# EAGLE board PowerModule_v001 (EAGLE 9.6.2)

Size 160 x 100 mm. Coordinates in mm from the lower left corner, seen from the top.
Outline: 0,0 160,0 160,100 0,100 0,0
Copper layers (1*16): Top 0.035mm / dielectric 1.5mm / Bottom 0.035mm
Design rules "default": minimum track width 6mil, minimum drill 0.35mm, track to track 6mil, track to pad 6mil, pad to pad 6mil, via to via 6mil, smd to smd 6mil, copper to edge 40mil, drill to drill 6mil, minimum pad ring 10mil, minimum via ring 8mil, stop-mask expansion 4mil, vias tented up to drill 0mil, thermal gap 10mil
Net classes: 0 default: width 0.152 mm, clearance 0.152 mm

## Footprints (pad centres in the part's own frame; a part is rotated, then mirrored left to right if it is on the bottom)
0603 = smd 1.1 x 1: 1 -0.85,0; 2 0.85,0
NIC_10X10.5_CAP = smd 4 x 2.5: + 4,0; - -4,0
1X2-3.5MM = drill 1 pad 2.184: 1 1.8,0; 2 -1.7,0
JST-2-SMD = smd 1 x 4.6: 1 -1,-3.7; 2 1,-3.7 | smd 1.6 x 3.4: NC1 -3.4,1.5; NC2 3.4,1.5
JUMPER2 = drill 1 pad 1.93 octagon: 1 2.54,0; 2 0,0
SMT-JUMPER_2_NC_TRACE_NO-SILK = smd 0.635 x 1.27: 1 -0.508,0; 2 0.508,0
CHIP-LED0603 = smd 0.8 x 0.8: A 0,-0.75; C 0,0.75
R0603_P = smd 0.7 x 0.85: 1 -0.65,0; 2 0.65,0
SWITCH-2.5X3.2-6 = drill 1 pad 1.8: 1 0,0; 2 0,2.5; 3 0,5; 4 3.2,0; 5 3.2,2.5; 6 3.2,5
MA12-1 = drill 1.016 long: 1 -13.97,0; 2 -11.43,0; 3 -8.89,0; 4 -6.35,0; 5 -3.81,0; 6 -1.27,0; 7 1.27,0; 8 3.81,0; 9 6.35,0; 10 8.89,0; 11 11.43,0; 12 13.97,0
S2751-46R = smd 2.2 x 1.4: 1 0,0
PARTICLE_POWER_MODULE_SMT = smd 2.032 x 2.794: 1 5.08,1.016; 2 7.62,1.016; 3 10.16,1.016; 4 12.7,1.016; 5 15.24,1.016; 6 17.78,1.016; 7 20.32,1.016; 8 22.86,1.016; 9 25.4,1.016; 10 27.94,1.016; 11 30.48,1.016; 12 33.02,1.016; 13 33.02,21.869; 14 30.48,21.869; 15 27.94,21.869; 16 25.4,21.869; 17 22.86,21.869; 18 20.32,21.869; 19 17.78,21.869; 20 15.24,21.869; 21 12.7,21.869; 22 10.16,21.869; 23 7.62,21.869; 24 5.08,21.869; 25 2.54,21.869 | smd 3.5 x 2.2: 26 13.239,12.153 | smd 2.8 x 2.8: 27 26.803,10.82 | smd 1.2 x 1.4: 28 30.969,11.698; 29 32.969,11.698

## Placement (x,y rotation side)
C1  0.1uF  [0603]  86.36,10.16 90 top
C2  100pF  [0603]  90.17,10.16 90 top
C3  47uF  [NIC_10X10.5_CAP]  99.06,15.24 90 top
C4  0.1uF  [0603]  107.95,10.16 90 top
C5  47uF  [NIC_10X10.5_CAP]  77.47,15.24 90 top
C6  100pF  [0603]  107.95,13.97 90 top
C7  47uF  [NIC_10X10.5_CAP]  116.84,15.24 90 top
C8  0.1uF  [0603]  125.73,10.16 90 top
C9  100pF  [0603]  125.73,13.97 90 top
C10  0.1uF  [0603]  -26.67,-234.95 0 top  (outside the outline)
J1  1X2-3.5MM  [1X2-3.5MM]  50.8,12.7 90 top
J2  1X2-3.5MM  [1X2-3.5MM]  60.96,12.7 90 top
J4  [JST-2-SMD]  -24.13,-182.88 0 top  (outside the outline)
J9  1X2-3.5MM  [1X2-3.5MM]  40.64,12.7 90 top
JP1  [JUMPER2]  -26.67,-132.08 0 top  (outside the outline)
JP2  [JUMPER2]  -26.67,-137.16 0 top  (outside the outline)
JP7  JUMPER-SMT_2_NC_TRACE_NO-SILK  [SMT-JUMPER_2_NC_TRACE_NO-SILK]  -20.32,-173.99 0 top  (outside the outline)
JP9  [JUMPER2]  -26.67,-127 0 top  (outside the outline)
LED3  [CHIP-LED0603]  -25.4,-170.18 0 top  (outside the outline)
R13  2K  [R0603_P]  -26.67,-177.8 0 top  (outside the outline)
R19  10K  [R0603_P]  -26.67,-163.83 0 top  (outside the outline)
S4  [SWITCH-2.5X3.2-6]  -26.67,-160.02 0 top  (outside the outline)
SV1  [MA12-1]  -12.7,-228.6 0 top  (outside the outline)
TP1  [S2751-46R]  130.81,10.16 90 top
TP2  [S2751-46R]  -26.67,-101.6 0 top  (outside the outline)
TP3  [S2751-46R]  -26.67,-106.68 0 top  (outside the outline)
TP4  [S2751-46R]  -26.67,-111.76 0 top  (outside the outline)
TP5  [S2751-46R]  -26.67,-116.84 0 top  (outside the outline)
TP6  [S2751-46R]  -26.67,-121.92 0 top  (outside the outline)
U$2  PARTICLE_POWER_MODULE_SMT  [PARTICLE_POWER_MODULE_SMT]  43.18,-80.01 0 top  (outside the outline)

## Library data of the parts
C1 C2 C4 C6 C8-C10 = SparkFun-Capacitors; PROD_ID: CAP-08604
C3 C5 C7 = particle-studios; PROD_ID: CAP-08362
J1 J2 J9 LED3 = adafruit
J4 = SparkFun-Connectors; PROD_ID: CONN-11443
JP1 JP2 JP9 = microbuilder
JP7 = SparkFun-Jumpers
R13 = particle-studios; DESP: RES SMD 2K2 OHM 1% 1/10W 0603
R19 = particle-studios; DESP: RES SMD 100K OHM 1% 1/10W 0603
S4 = SparkFun-Retired
SV1 = con-lstb; OC_FARNELL: unknown; OC_NEWARK: unknown
TP1-TP6 U$2 = particle-studios

## Nets
+3V3: C1.1 C2.1 C5.+ J9.1 JP7.1 JP9.1 R19.2 SV1.11 TP1.1 U$2.1 U$2.2
GND: C1.2 C2.2 C3.- C4.2 C5.- C6.2 C7.- C8.2 C9.2 J1.2 J2.2 J9.2 JP1.2 JP2.2 JP9.2 SV1.12 TP2.1 TP4.1 TP6.1 U$2.9 U$2.10 U$2.26 U$2.27
N$1: JP7.2 R13.1
N$2: C3.+ C4.1 C6.1 J1.1 JP1.1 TP3.1 U$2.5 U$2.6
N$3: C7.+ C8.1 C9.1 J2.1 JP2.1 TP5.1 U$2.11 U$2.12
N$4: SV1.2 U$2.24
N$5: SV1.4 U$2.17
N$6: SV1.5 U$2.16
N$7: SV1.6 U$2.15
N$8: SV1.7 U$2.14
N$9: R19.1 S4.2 S4.5
N$10: C10.1 J4.1 U$2.21 U$2.22
N$11: LED3.C SV1.8 U$2.13
N$12: LED3.A R13.2
N$13: S4.3 S4.6 SV1.1 U$2.25
N$14: C10.2 J4.2 U$2.18 U$2.19 U$2.20
N$15: SV1.9 U$2.29
N$16: SV1.10 U$2.28
PMIC_REG: SV1.3
PMIC_RGEN: U$2.7

## Tracks (layer width: path | path; a pad name or v marks a point on that pad's centre or on a via)
+3V3  (10 unrouted)
GND  (22 unrouted)
N$1  (1 unrouted)
N$2  (7 unrouted)
N$3  (7 unrouted)
N$4  (1 unrouted)
N$5  (1 unrouted)
N$6  (1 unrouted)
N$7  (1 unrouted)
N$8  (1 unrouted)
N$9  (2 unrouted)
N$10  (3 unrouted)
N$11  (2 unrouted)
N$12  (1 unrouted)
N$13  (3 unrouted)
N$14  (4 unrouted)
N$15  (1 unrouted)
N$16  (1 unrouted)